# Altium PCB LED PD AB WH 3000149 (4F00228L_7P00501A).PcbDoc
Units mm, origin at the board's own origin, x right, y up, seen from the top; angles counter-clockwise.
Board outline 284.5 x 190 mm, 2 copper layers (Top Layer, Bottom Layer); 166 components, 73 nets, 404 pads, 0 vias.
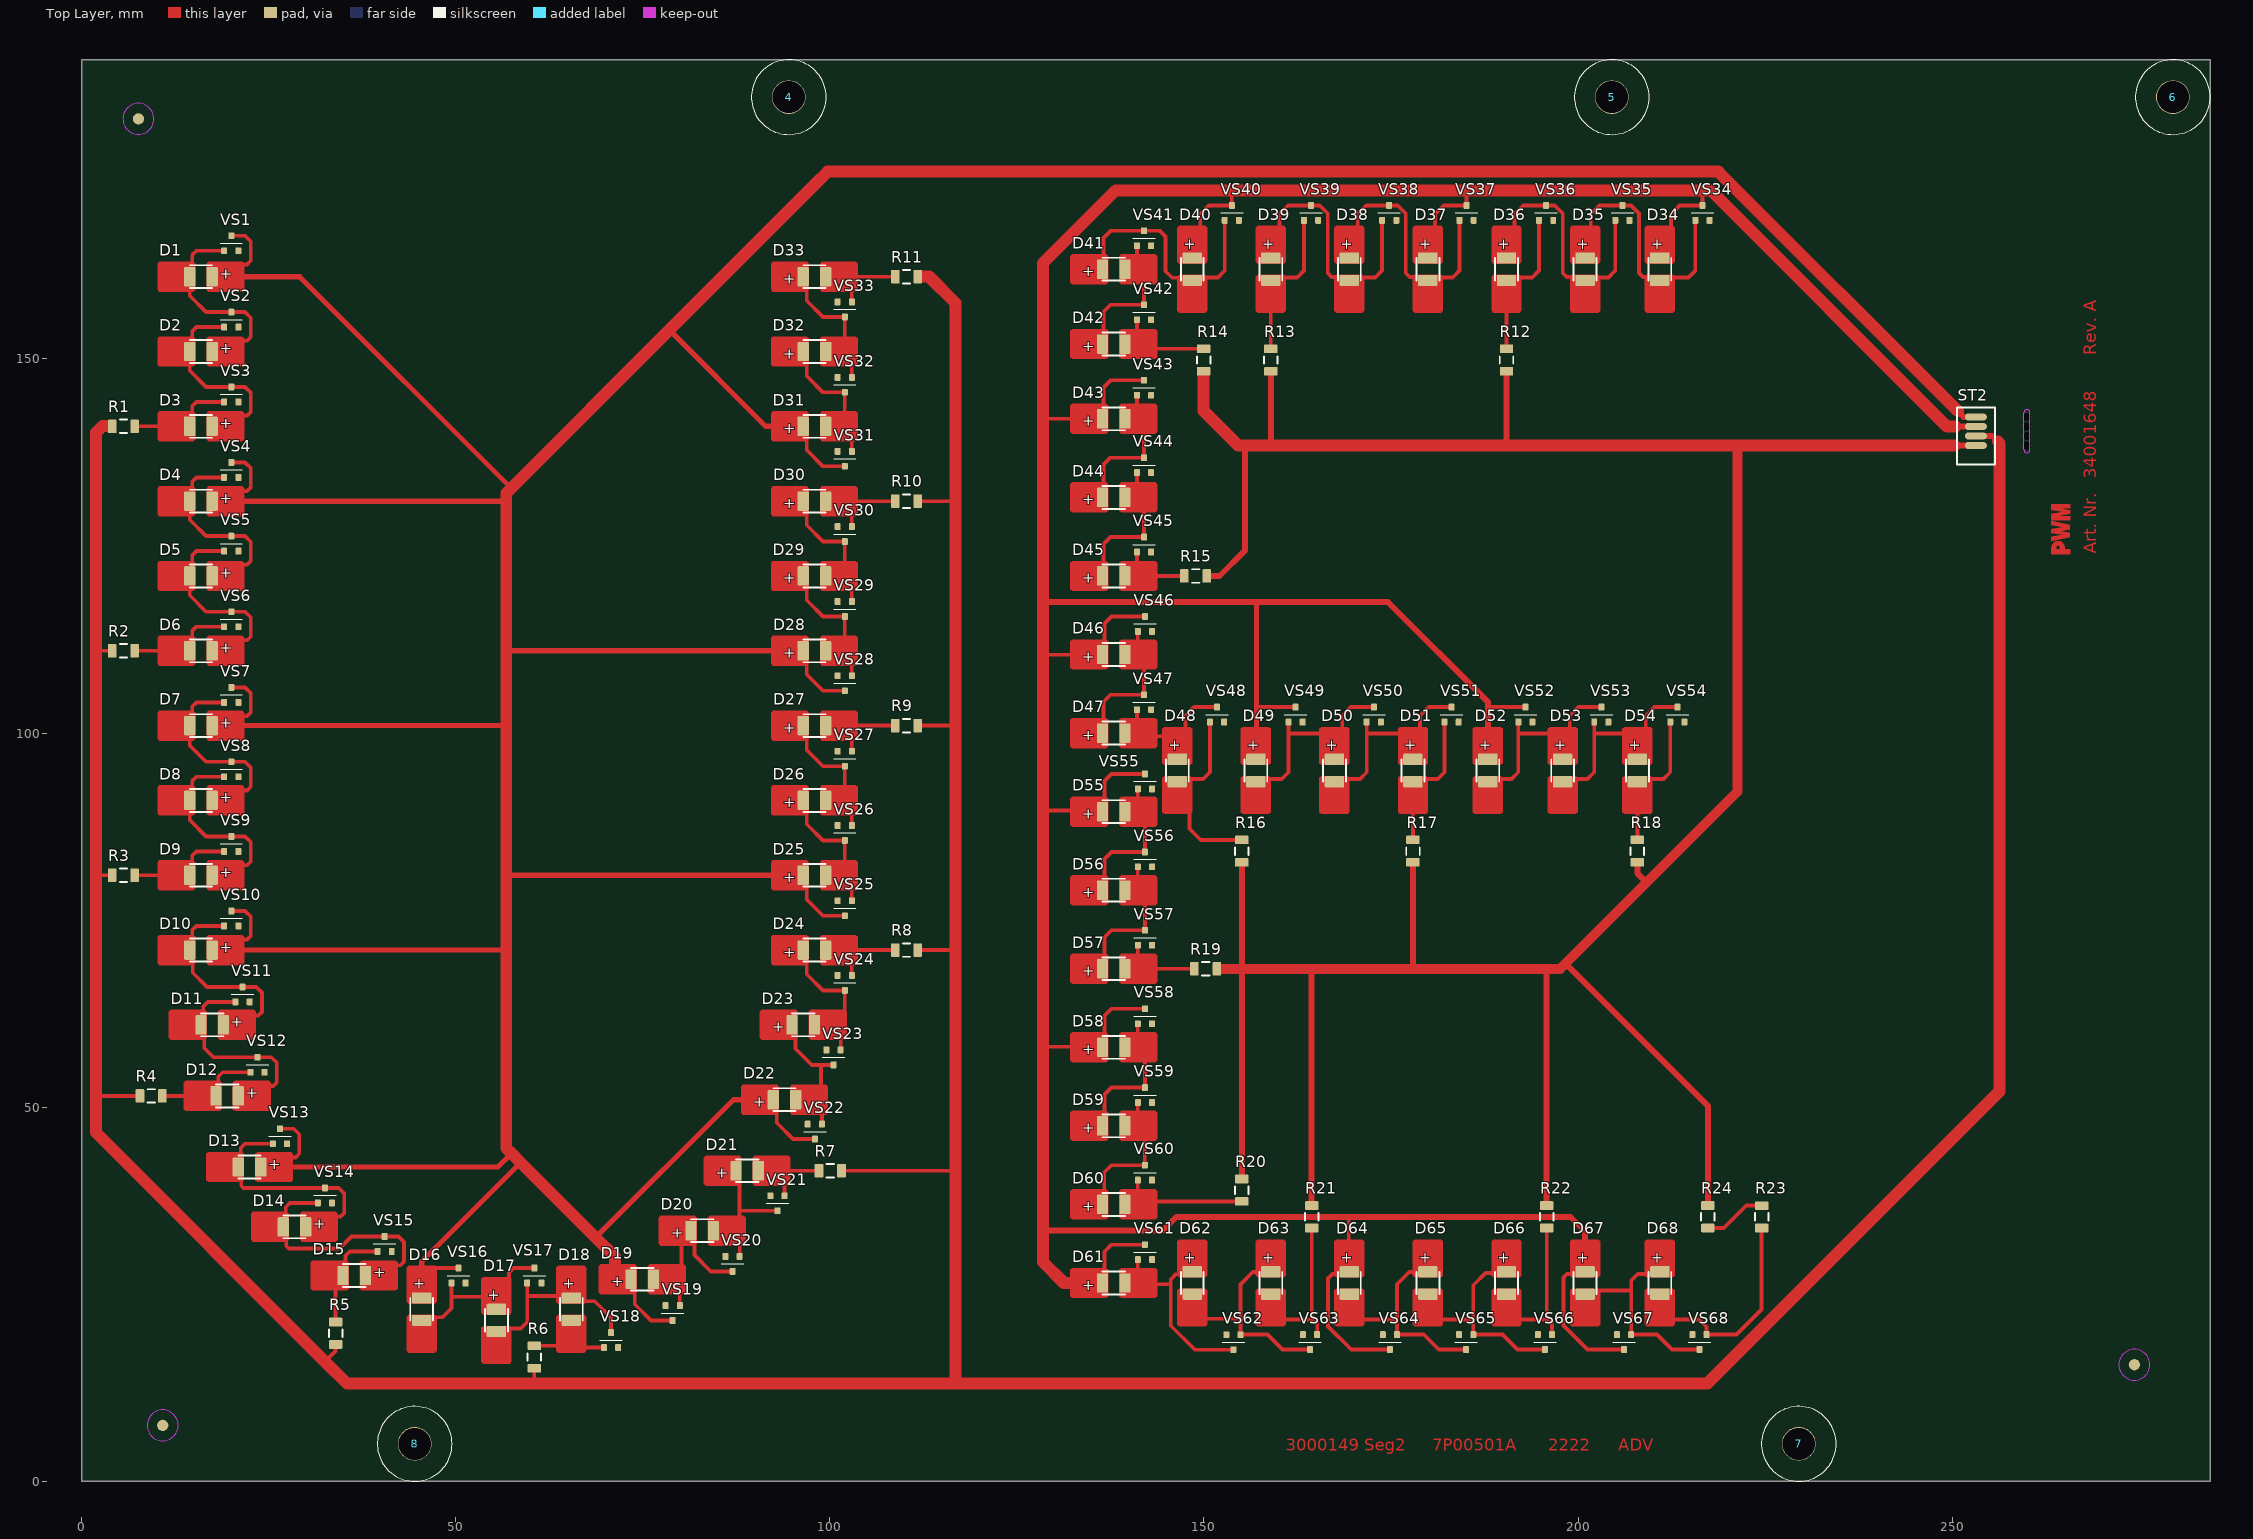
[diagram p0: Top Layer view]
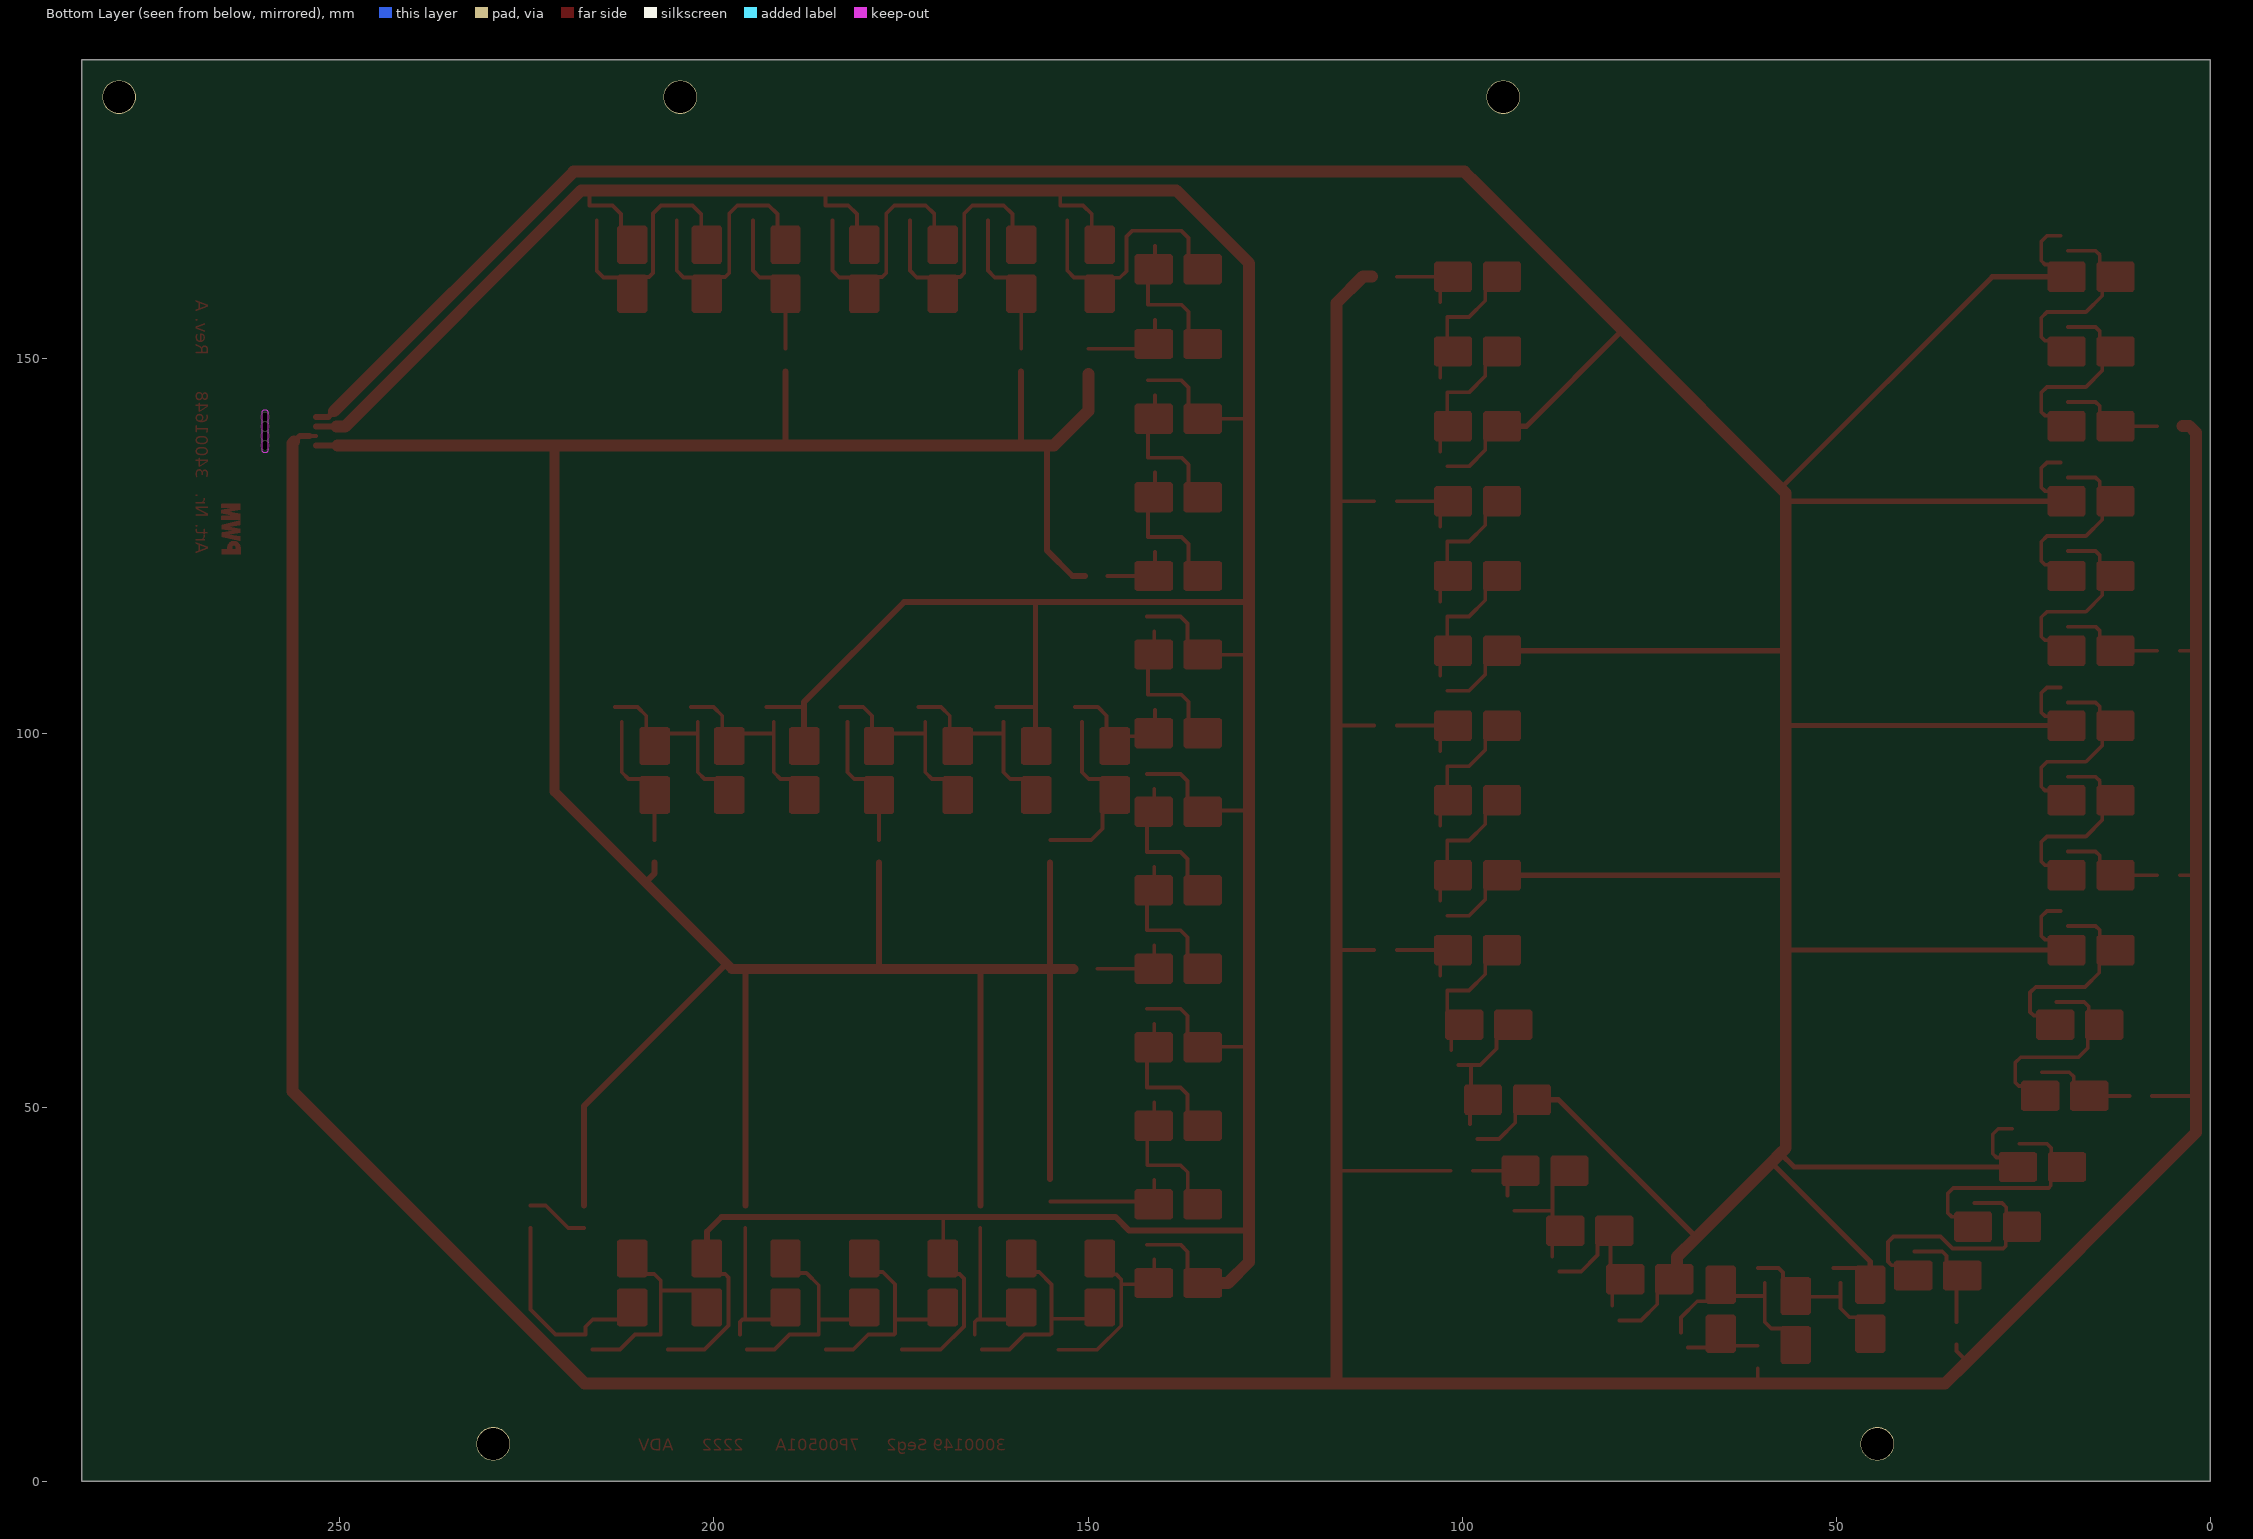
[diagram p1: Bottom Layer view, seen from below]
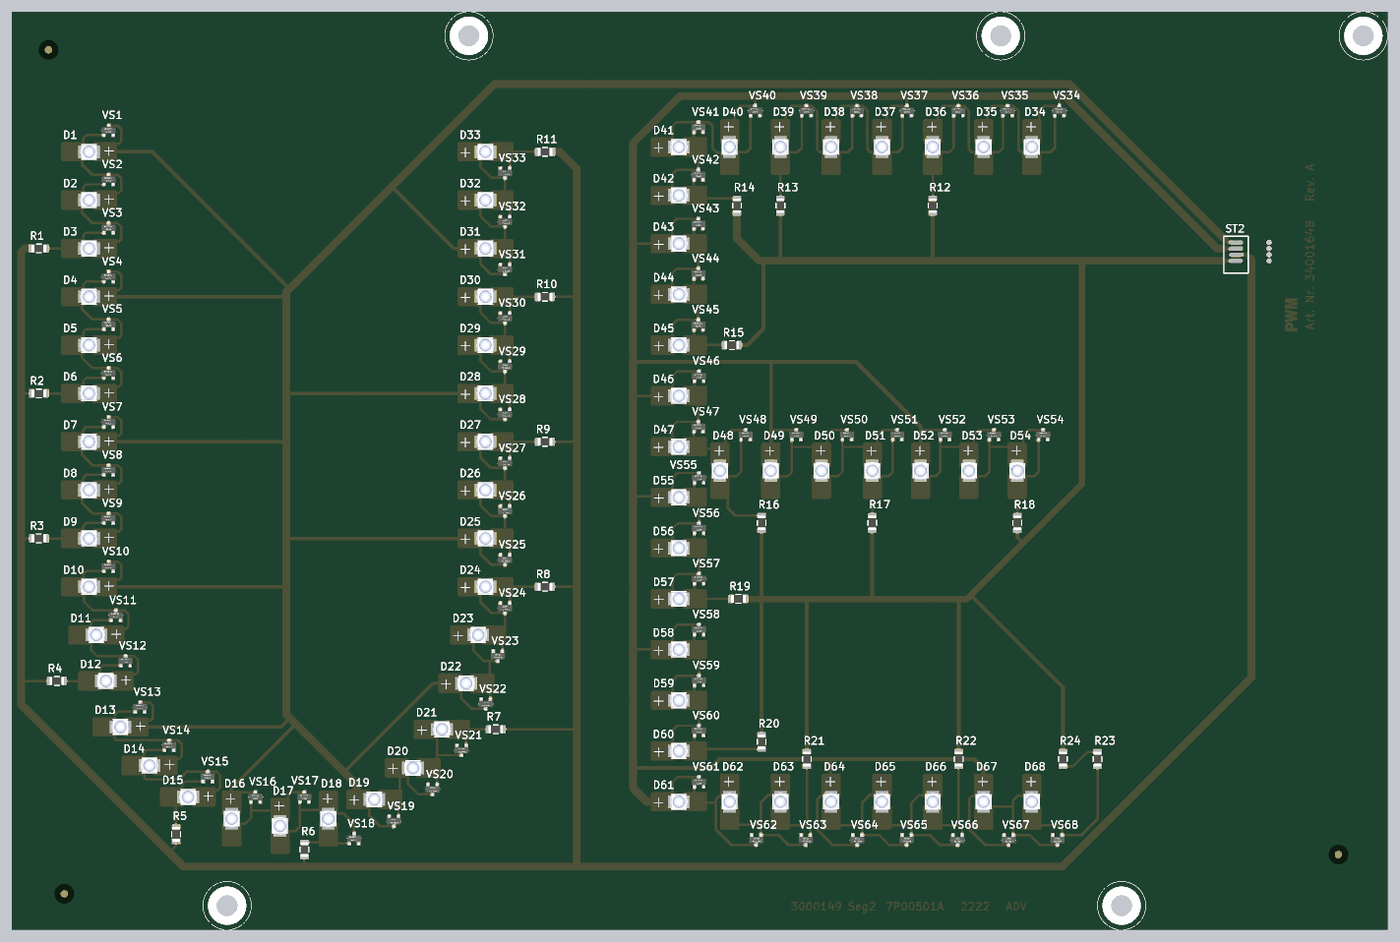
[diagram p2: 3D render of the assembled board from above, using the file's embedded part models]

## Layer stack, top to bottom
Top Solder: solder mask 0.0102, Solder Resist, Dk 3.5
Top Layer: signal copper 0.0356
Dielectric 1: dielectric 0.32, FR-4, Dk 4.8
Bottom Layer: signal copper 0.0356
Bottom Solder: solder mask 0.0102, Solder Resist, Dk 3.5

## Board outline
0,0 284.5,0 284.5,190 0,190

## Design rules (kind name [scope] priority, off if disabled: settings)
Clearance [All] p1: gap=0.3 ignorepadtopadclearanceinfootprint=FALSE
PolygonConnect [All] p1: connectstyle=Relief reliefconductorwidth=0.254 reliefentries=4 polygonreliefangle="90 Angle" airgapwidth=0.254
RoutingVias [All] p1: holewidth=0.711 width=1.27 viastyle="Through Hole" minholewidth=0.1 minwidth=0.1 maxholewidth=5 maxwidth=5
SolderMaskExpansion [All] p1: expansion=0.102
Width [All] p1: maxlimit=5 minlimit=0.1 preferedwidth=0.5
30 further rules are at their usual default settings.

## Components (designator, comment, footprint, x,y, rotation, side; value= is the part's Value field where it differs from the comment)
4 "" DRILL4.3 94.5,185 r0 top
5 "" DRILL4.3 204.5,185 r0 top
6 "" DRILL4.3 279.5,185 r0 top
7 "" DRILL4.3 229.5,5 r0 top
8 "" DRILL4.3 44.5,5 r0 top
D1 "LT_T66G" T66G 15.933,161 r0 top
D2 "LT_T66G" T66G 15.933,151 r0 top
D3 "LT_T66G" T66G 15.933,141 r0 top
D4 "LT_T66G" T66G 15.933,131 r0 top
D5 "LT_T66G" T66G 15.933,121 r0 top
D6 "LT_T66G" T66G 15.933,111 r0 top
D7 "LT_T66G" T66G 15.933,101 r0 top
D8 "LT_T66G" T66G 15.933,91 r0 top
D9 "LT_T66G" T66G 15.933,81 r0 top
D10 "LT_T66G" T66G 15.933,71 r0 top
D11 "LT_T66G" T66G 17.433,61 r0 top
D12 "LT_T66G" T66G 19.433,51.5 r0 top
D13 "LT_T66G" T66G 22.433,42 r0 top
D14 "LT_T66G" T66G 28.433,34 r0 top
D15 "LT_T66G" T66G 36.433,27.5 r0 top
D16 "LT_T66G" T66G 45.433,23 r90 top
D17 "LT_T66G" T66G 55.433,21.5 r90 top
D18 "LT_T66G" T66G 65.433,23 r90 top
D19 "LT_T66G" T66G 74.933,27 r180 top
D20 "LT_T66G" T66G 82.933,33.5 r180 top
D21 "LT_T66G" T66G 88.933,41.5 r180 top
D22 "LT_T66G" T66G 93.933,51 r180 top
D23 "LT_T66G" T66G 96.433,61 r180 top
D24 "LT_T66G" T66G 97.933,71 r180 top
D25 "LT_T66G" T66G 97.933,81 r180 top
D26 "LT_T66G" T66G 97.933,91 r180 top
D27 "LT_T66G" T66G 97.933,101 r180 top
D28 "LT_T66G" T66G 97.933,111 r180 top
D29 "LT_T66G" T66G 97.933,121 r180 top
D30 "LT_T66G" T66G 97.933,131 r180 top
D31 "LT_T66G" T66G 97.933,141 r180 top
D32 "LT_T66G" T66G 97.933,151 r180 top
D33 "LT_T66G" T66G 97.933,161 r180 top
D34 "LT_T66G" T66G 210.933,162 r90 top
D35 "LT_T66G" T66G 200.933,162 r90 top
D36 "LT_T66G" T66G 190.433,162 r90 top
D37 "LT_T66G" T66G 179.933,162 r90 top
D38 "LT_T66G" T66G 169.433,162 r90 top
D39 "LT_T66G" T66G 158.933,162 r90 top
D40 "LT_T66G" T66G 148.433,162 r90 top
D41 "LT_T66G" T66G 137.933,162 r180 top
D42 "LT_T66G" T66G 137.933,152 r180 top
D43 "LT_T66G" T66G 137.933,142 r180 top
D44 "LT_T66G" T66G 137.933,131.5 r180 top
D45 "LT_T66G" T66G 137.933,121 r180 top
D46 "LT_T66G" T66G 137.933,110.5 r180 top
D47 "LT_T66G" T66G 137.933,100 r180 top
D48 "LT_T66G" T66G 146.433,95 r90 top
D49 "LT_T66G" T66G 156.933,95 r90 top
D50 "LT_T66G" T66G 167.433,95 r90 top
D51 "LT_T66G" T66G 177.933,95 r90 top
D52 "LT_T66G" T66G 187.933,95 r90 top
D53 "LT_T66G" T66G 197.933,95 r90 top
D54 "LT_T66G" T66G 207.933,95 r90 top
D55 "LT_T66G" T66G 137.933,89.5 r180 top
D56 "LT_T66G" T66G 137.933,79 r180 top
D57 "LT_T66G" T66G 137.933,68.5 r180 top
D58 "LT_T66G" T66G 137.933,58 r180 top
D59 "LT_T66G" T66G 137.933,47.5 r180 top
D60 "LT_T66G" T66G 137.933,37 r180 top
D61 "LT_T66G" T66G 137.933,26.5 r180 top
D62 "LT_T66G" T66G 148.433,26.5 r90 top
D63 "LT_T66G" T66G 158.933,26.5 r90 top
D64 "LT_T66G" T66G 169.433,26.5 r90 top
D65 "LT_T66G" T66G 179.933,26.5 r90 top
D66 "LT_T66G" T66G 190.433,26.5 r90 top
D67 "LT_T66G" T66G 200.933,26.5 r90 top
D68 "LT_T66G" T66G 210.933,26.5 r90 top
R1 "R1206S" RC1206S 5.574,141 r0 top value=Pos.20
R2 "R1206S" RC1206S 5.574,111 r0 top value=Pos.20
R3 "R1206S" RC1206S 5.574,81 r0 top value=Pos.20
R4 "R1206S" RC1206S 9.286,51.5 r0 top value=Pos.20
R5 "R1206S" RC1206S 33.933,19.78 r90 top value=Pos.20
R6 "R1206S" RC1206S 60.494,16.6 r90 top value=Pos.20
R7 "R1206S" RC1206S 100.045,41.5 r180 top value=Pos.20
R8 "R1206S" RC1206S 110.241,71 r180 top value=Pos.20
R9 "R1206S" RC1206S 110.241,101 r180 top value=Pos.20
R10 "R1206S" RC1206S 110.241,131 r180 top value=Pos.20
R11 "R1206S" RC1206S 110.241,161 r180 top value=Pos.20
R12 "R1206S" RC1206S 190.433,149.858 r90 top value=Pos.20
R13 "R1206S" RC1206S 158.933,149.858 r90 top value=Pos.20
R14 "R1206S" RC1206S 149.957,149.858 r90 top value=Pos.20
R15 "R1206S" RC1206S 148.887,121 r180 top value=Pos.20
R16 "R1206S" RC1206S 155.05,84.223 r90 top value=Pos.20
R17 "R1206S" RC1206S 177.933,84.223 r90 top value=Pos.20
R18 "R1206S" RC1206S 207.933,84.223 r90 top value=Pos.20
R19 "R1206S" RC1206S 150.225,68.5 r180 top value=Pos.20
R20 "R1206S" RC1206S 155.05,38.9 r270 top value=Pos.20
R21 "R1206S" RC1206S 164.4,35.35 r270 top value=Pos.20
R22 "R1206S" RC1206S 195.8,35.35 r270 top value=Pos.20
R23 "R1206S" RC1206S 224.533,35.343 r270 top value=Pos.22
R24 "R1206S" RC1206S 217.353,35.35 r270 top value=Pos.20
ST2 "BAND4" BAND4 253.17,142.25 r270 top (schematic designator ST1)
VS1 "BZX84" SOT23 19.988,165.461 r90 top
VS2 "BZX84" SOT23 19.988,155.268 r90 top
VS3 "BZX84" SOT23 19.988,145.262 r90 top
VS4 "BZX84" SOT23 19.988,135.17 r90 top
VS5 "BZX84" SOT23 19.988,125.327 r90 top
VS6 "BZX84" SOT23 19.988,115.227 r90 top
VS7 "BZX84" SOT23 19.988,105.097 r90 top
VS8 "BZX84" SOT23 19.988,95.156 r90 top
VS9 "BZX84" SOT23 19.988,85.175 r90 top
VS10 "BZX84" SOT23 19.988,75.224 r90 top
VS11 "BZX84" SOT23 21.488,65.072 r90 top
VS12 "BZX84" SOT23 23.488,55.667 r90 top
VS13 "BZX84" SOT23 26.488,46.112 r90 top
VS14 "BZX84" SOT23 32.5,38.2 r90 top
VS15 "BZX84" SOT23 40.488,31.714 r90 top
VS16 "BZX84" SOT23 50.37,27.5 r90 top
VS17 "BZX84" SOT23 60.494,27.5 r90 top
VS18 "BZX84" SOT23 70.752,18.875 r90 top
VS19 "BZX84" SOT23 78.988,22.48 r270 top
VS20 "BZX84" SOT23 86.988,29.048 r270 top
VS21 "BZX84" SOT23 92.988,37.144 r270 top
VS22 "BZX84" SOT23 97.988,46.736 r270 top
VS23 "BZX84" SOT23 100.487,56.646 r270 top
VS24 "BZX84" SOT23 101.988,66.602 r270 top
VS25 "BZX84" SOT23 101.988,76.594 r270 top
VS26 "BZX84" SOT23 101.988,86.646 r270 top
VS27 "BZX84" SOT23 101.988,96.575 r270 top
VS28 "BZX84" SOT23 101.988,106.668 r270 top
VS29 "BZX84" SOT23 101.988,116.584 r270 top
VS30 "BZX84" SOT23 101.988,126.599 r270 top
VS31 "BZX84" SOT23 101.988,136.651 r270 top
VS32 "BZX84" SOT23 101.988,146.541 r270 top
VS33 "BZX84" SOT23 101.988,156.624 r270 top
VS34 "BZX84" SOT23 216.627,169.527 r90 top
VS35 "BZX84" SOT23 205.926,169.527 r90 top
VS36 "BZX84" SOT23 195.733,169.527 r90 top
VS37 "BZX84" SOT23 185.101,169.527 r90 top
VS38 "BZX84" SOT23 174.754,169.527 r90 top
VS39 "BZX84" SOT23 164.315,169.527 r90 top
VS40 "BZX84" SOT23 153.721,169.527 r90 top
VS41 "BZX84" SOT23 141.988,166.125 r90 top
VS42 "BZX84" SOT23 141.988,156.259 r90 top
VS43 "BZX84" SOT23 141.988,146.143 r90 top
VS44 "BZX84" SOT23 141.988,135.815 r90 top
VS45 "BZX84" SOT23 141.988,125.204 r90 top
VS46 "BZX84" SOT23 142.109,114.584 r90 top
VS47 "BZX84" SOT23 141.988,104.124 r90 top
VS48 "BZX84" SOT23 151.75,102.475 r90 top
VS49 "BZX84" SOT23 162.244,102.475 r90 top
VS50 "BZX84" SOT23 172.7,102.475 r90 top
VS51 "BZX84" SOT23 183.1,102.475 r90 top
VS52 "BZX84" SOT23 192.962,102.475 r90 top
VS53 "BZX84" SOT23 203.114,102.475 r90 top
VS54 "BZX84" SOT23 213.273,102.475 r90 top
VS55 "BZX84" SOT23 142.109,93.541 r90 top
VS56 "BZX84" SOT23 142.109,83.116 r90 top
VS57 "BZX84" SOT23 142.109,72.651 r90 top
VS58 "BZX84" SOT23 142.109,62.155 r90 top
VS59 "BZX84" SOT23 142.109,51.618 r90 top
VS60 "BZX84" SOT23 142.1,41.25 r90 top
VS61 "BZX84" SOT23 142.109,30.625 r90 top
VS62 "BZX84" SOT23 153.933,18.593 r270 top
VS63 "BZX84" SOT23 164.175,18.6 r270 top
VS64 "BZX84" SOT23 174.85,18.6 r270 top
VS65 "BZX84" SOT23 185.05,18.6 r270 top
VS66 "BZX84" SOT23 195.575,18.6 r270 top
VS67 "BZX84" SOT23 206.15,18.6 r270 top
VS68 "BZX84" SOT23 216.229,18.6 r270 top

## Footprints (in the part's own frame and the unit in brackets; to place one, negate y for a bottom-side part, rotate by r counter-clockwise, add the part's x,y. Pads: shape width x height; smd on the part's side, far side on the other; paste and mask are expansions set on the pad)
BAND4 [mm]
  oval 0.91x2.95 smd paste-0.025: 1(0,0) 2(1.27,0) 3(2.54,0) 4(3.81,0)
  round 1.2 hole 1.2 unplated: 5(0,6.83) 6(1.27,6.83) 7(2.54,6.83) 8(3.81,6.83)
  Keep-Out Layer lines w0.1: 4.395,6.43 ccw(c4.395,6.83) 4.395,7.23 -0.585,7.23 ccw(c-0.585,6.83) -0.585,6.43 4.395,6.43
  silkscreen extent -1.27,-2.54 6.35,2.54
DRILL4.3 [mm]
  round 4.5 hole 4.3 unplated: 1(0,0)
  silkscreen extent -5,-5 5,5, body extent -4,-4 4,4
RC1206S [mm]
  rrect20% 1.15x1.8 smd paste-0.025 mask+0.1: 1(-1.5,0) 2(1.5,0)
  silkscreen extent -0.5,-0.9 0.5,0.9, body extent -1.5,-0.8 1.5,0.8, height 0.63
SOT23 [mm]
  rrect25% 0.9x0.8 smd paste-0.025: 1(-1,0.95) 2(-1,-0.95) 3(1,0)
  silkscreen extent 0,-1.5 0,1.5, body extent -1.25,-1.5 1.25,1.5, height 1.09
T66G [mm]
  rrect20% 1.5x2.6 smd paste-0.025 mask-1: 1(-1.5,0) 2(1.5,0)
  Top Layer region: -5.55,2 -5.8,1.75 -5.8,-1.75 -5.55,-2 -1,-2 -0.75,-1.75 -0.75,1.75 -1,2
  Top Layer region: 0.75,1.75 0.75,-1.75 1,-2 5.55,-2 5.8,-1.75 5.8,1.75 5.55,2 1,2
  silkscreen extent -1.5,-1.53 1.5,1.53, body extent -1.78,-1.4 1.77,1.4, height 3.82

## Part data
D1 D2 D3 D4 D5 D6 D7 D8 D9 D10 D11 D12 D13 D14 D15 D16 D17 D18 D19 D20 D21 D22 D23 D24 D25 D26 D27 D28 D29 D30 D31 D32 D33 D34 D35 D36 D37 D38 D39 D40 D41 D42 D43 D44 D45 D46 D47 D48 D49 D50 D51 D52 D53 D54 D55 D56 D57 D58 D59 D60 D61 D62 D63 D64 D65 D66 D67 D68: "{Description}"
VS1 VS2 VS3 VS4 VS5 VS6 VS7 VS8 VS9 VS10 VS11 VS12 VS13 VS14 VS15 VS16 VS17 VS18 VS19 VS20 VS21 VS22 VS23 VS24 VS25 VS26 VS27 VS28 VS29 VS30 VS31 VS32 VS33 VS34 VS35 VS36 VS37 VS38 VS39 VS40 VS41 VS42 VS43 VS44 VS45 VS46 VS47 VS48 VS49 VS50 VS51 VS52 VS53 VS54 VS55 VS56 VS57 VS58 VS59 VS60 VS61 VS62 VS63 VS64 VS65 VS66 VS67 VS68: OriginalName=DIODE

## Free pads (board coordinates)
  round 1.5 smd paste-1 mask+1.3: 2(7.575,182.1) 2(10.825,7.475) 2(274.35,15.575)

## Nets (pads, with @x,y where several pads share a name; then routed paths per layer and width w, separated by ;. In a path a pad name is that pad's centre, name@x,y a point inside that pad or via, vN(x,y) a via of type N, cw(c..) or ccw(c..) an arc to the next point about the centre after c; other vN are vias at no path point)
+U1: D1.2 D4.2 D7.2 D10.2 D13.2 D16.2 D19.2 D22.2 D25.2 D28.2 D31.2 ST2.1 VS1.3 VS4.3 VS7.3 VS10.3 VS13.3 VS16.3 VS19.3 VS22.3 VS25.3 VS28.3 VS31.3 | length 785.3
  Top Layer w0.5: VS10.3 21.839,76.224 22.582,75.482 22.582,72.886 22.087,72.392 21.315,72.392 ; VS7.3 21.839,106.097 22.582,105.355 22.582,102.759 22.087,102.265 21.315,102.265 ; VS4.3 21.839,136.17 22.582,135.428 22.582,132.832 22.087,132.338 21.315,132.338 ; VS1.3 21.839,166.461 22.582,165.718 22.582,163.123 22.087,162.628 21.315,162.628 ; VS13.3 28.339,47.112 29.082,46.369 29.082,43.773 28.588,43.279 27.815,43.279 ; 46.665,28.5 VS16.3 ; D19.2@73.433,26.857 73.905,26.385 73.905,23.654 76.078,21.48 VS19.3 ; D22.2@92.433,51.113 92.905,50.641 92.905,47.91 95.078,45.736 VS22.3 ; D25.2@96.433,80.97 96.905,80.498 96.905,77.767 99.078,75.594 VS25.3 ; D28.2@96.433,111.045 96.905,110.573 96.905,107.842 99.078,105.668 VS28.3 ; D31.2@96.433,141.027 96.905,140.555 96.905,137.824 99.078,135.651 VS31.3
  Top Layer w0.7: D10.2 56.468,71 56.74,71.272 ; D7.2 56.486,101 56.74,101.255 ; D4.2 56.601,131 56.74,130.86 ; D1.2 29.127,161 57.401,132.726 ; D13.2 55.613,42 57.438,43.824 ; D16.2 45.433,29.347 58.674,42.588 ; 56.74,80.818 56.923,81 D25.2 ; 56.74,110.744 56.996,111 D28.2 ; 68.691,32.571 87.121,51 D22.2 ; 78.549,153.875 91.424,141 D31.2
  Top Layer w0.8: 250.776,143.016 251.543,142.25 ST2.1
  Top Layer w1.6: 71.285,27.969 71.285,29.977 68.691,32.571 58.674,42.588 57.438,43.824 56.74,44.522 56.74,71.272 56.74,80.818 56.74,101.255 56.74,110.744 56.74,130.86 56.74,132.066 57.401,132.726 78.549,153.875 98.001,173.326 99.707,175.032 218.761,175.032 250.776,143.016
+U2: D34.2 D37.2 D40.2 D43.2 D46.2 D49.2 D52.2 D55.2 D58.2 D61.2 D64.2 D67.2 ST2.2 VS34.3 VS37.3 VS40.3 VS43.3 VS46.3 VS49.3 VS52.3 VS55.3 VS58.3 VS61.3 VS64.3 VS67.3 | length 588
  Top Layer w0.5: 128.456,58.1 128.492,58.064 133.192,58.064 ; 128.456,89.81 128.599,89.668 133.05,89.668 ; 128.456,110.748 128.741,110.463 133.192,110.463 ; 128.456,141.908 128.552,142.004 132.913,142.004 ; 136.571,143.662 136.571,146.207 137.507,147.143 VS43.3 ; 136.692,28.145 136.692,30.689 137.628,31.625 VS61.3 ; 136.692,59.675 136.692,62.219 137.628,63.155 VS58.3 ; 136.692,91.061 136.692,93.605 137.628,94.541 VS55.3 ; 136.692,112.103 136.692,114.648 137.628,115.584 VS46.3 ; 149.711,167.089 149.505,167.295 149.505,169.375 150.656,170.527 VS40.3 153.721,172.494 153.685,172.53 ; 157.02,103.486 157.031,103.475 VS49.3 ; 158.028,100.244 158.234,100.038 ; 168.075,27.69 167.186,27.69 166.58,27.084 166.58,20.691 169.67,17.6 VS64.3 ; 169.337,31.29 169.337,35.263 169.39,35.316 ; 181.091,167.089 180.885,167.295 180.885,169.375 182.036,170.527 VS37.3 185.101,172.392 184.963,172.53 ; 188.012,103.475 VS52.3 ; 188.746,100.244 188.952,100.038 ; 199.375,27.69 198.486,27.69 198.042,27.246 198.042,20.8 201.242,17.6 VS67.3 ; 212.617,167.089 212.411,167.295 212.411,169.375 213.562,170.527 VS34.3 216.627,172.483 216.674,172.53
  Top Layer w0.7: 156.939,117.509 157.02,117.428 157.02,103.486 157.02,100.245
  Top Layer w0.8: 128.456,33.496 144.494,33.496 146.314,35.316 169.39,35.316 198.99,35.316 200.931,33.375 200.931,31.598 ; 128.456,117.226 128.738,117.509 156.939,117.509 174.595,117.509 187.933,104.171 D52.2 ; 250.423,140.972 ST2.2
  Top Layer w1.6: D61.2 131.289,26.5 128.456,29.333 128.456,33.496 128.456,58.1 128.456,89.81 128.456,110.748 128.456,117.226 128.456,141.908 128.456,162.78 138.207,172.53 153.685,172.53 184.963,172.53 216.674,172.53 217.734,172.53 249.285,140.98 250.423,140.972
-U1: R1.1 R2.1 R3.1 R4.1 R5.1 R6.1 R7.1 R8.1 R9.1 R10.1 R11.1 ST2.3 | length 666.8
  Top Layer w0.5: 1.917,51.394 2.023,51.5 R4.1 ; 1.917,81.042 1.958,81 R3.1 ; 1.917,110.995 1.922,111 R2.1 ; 32.516,15.997 33.933,17.414 R5.1 ; R6.1 60.494,13.183 60.591,13.086 ; R7.1 116.744,41.5 116.815,41.429 ; R8.1 116.761,71 116.815,70.946 ; R9.1 116.725,101 116.815,101.09 ; R10.1 116.761,131 116.815,131.054 ; ST2.3 ST2.3@254.049,139.71
  Top Layer w0.8: ST2.3@254.049,139.71 255.358,139.71 256.101,138.966
  Top Layer w1.6: R1.1@3.7,141.067 2.811,141.067 1.917,140.172 1.917,110.995 1.917,81.042 1.917,51.394 1.917,46.596 32.516,15.997 35.427,13.086 60.591,13.086 116.815,13.086 ; R11.1@112.021,161.032 113.248,161.032 116.815,157.466 116.815,131.054 116.815,101.09 116.815,70.946 116.815,41.429 116.815,13.086 ; 256.101,138.966 256.33,138.737 256.33,52.118 217.299,13.086 116.815,13.086
-U2: R12.1 R13.1 R14.1 R15.1 R16.1 R17.1 R18.1 R19.1 R20.1 R21.1 R22.1 R24.1 ST2.4 | length 439.3
  Top Layer w0.8: R15.1 152.073,121 155.45,124.377 155.45,138.44 ; R20.1 155.05,68.473 R16.1 ; R13.1 158.933,138.509 159.002,138.44 ; R21.1 164.4,68.411 164.461,68.473 ; 177.787,68.473 177.933,68.618 R17.1 ; R12.1 190.433,138.536 190.529,138.44 ; R22.1 195.8,68.402 195.871,68.473 ; 198.336,69.192 217.353,50.175 R24.1 ; R18.1 207.933,81.24 209.158,80.015 ; 250.318,138.44 ST2.4
  Top Layer w1.3: R19.1@151.949,68.473 155.05,68.473 164.461,68.473 177.787,68.473 195.871,68.473 197.616,68.473 198.336,69.192 209.158,80.015 221.312,92.168 221.312,138.44
  Top Layer w1.6: R14.1@149.957,147.997 149.957,143.046 154.563,138.44 155.45,138.44 159.002,138.44 190.529,138.44 221.312,138.44 250.318,138.44
NetD1_1: D1.1 D2.2 VS1.1 VS2.3 | length 21.8
  Top Layer w0.5: D1.1 14.433,158.463 16.628,156.268 VS2.3 21.839,156.268 22.582,155.525 22.582,152.929 22.087,152.435 21.315,152.435 ; 14.758,162.556 14.758,163.882 15.336,164.461 VS1.1
NetD2_1: D2.1 D3.2 VS2.1 VS3.3 | length 21.8
  Top Layer w0.5: D2.1@14.433,150.995 14.433,148.458 16.628,146.262 VS3.3 21.839,146.262 22.582,145.52 22.582,142.924 22.087,142.43 21.315,142.43 ; 14.758,152.362 14.758,153.689 15.336,154.268 VS2.1
NetD3_1: D3.1 R1.2 VS3.1 | length 10.8
  Top Layer w0.5: R1.2 11.879,141 12.006,141.127 ; 14.758,142.357 14.758,143.684 15.336,144.262 VS3.1
NetD4_1: D4.1 D5.2 VS4.1 VS5.3 | length 21.8
  Top Layer w0.5: D4.1@14.433,131.06 14.433,128.523 16.628,126.327 VS5.3 21.839,126.327 22.582,125.585 22.582,122.989 22.087,122.495 21.315,122.495 ; D4.1@14.758,132.265 14.758,133.592 15.336,134.17 VS4.1
NetD5_1: D5.1 D6.2 VS5.1 VS6.3 | length 21.8
  Top Layer w0.5: D5.1@14.433,120.96 14.433,118.423 16.628,116.227 VS6.3 21.839,116.227 22.582,115.485 22.582,112.889 22.087,112.395 21.315,112.395 ; 14.758,122.422 14.758,123.749 15.336,124.327 VS5.1
NetD6_1: D6.1 R2.2 VS6.1 | length 10.1
  Top Layer w0.5: R2.2 11.192,111 11.258,110.934 ; 14.758,112.322 14.758,113.649 15.336,114.227 VS6.1
NetD7_1: D7.1 D8.2 VS7.1 VS8.3 | length 21.8
  Top Layer w0.5: D7.1@14.433,100.888 14.433,98.351 16.628,96.156 VS8.3 21.839,96.156 22.582,95.413 22.582,92.817 22.087,92.323 21.315,92.323 ; D7.1@14.758,102.192 14.758,103.519 15.336,104.097 VS7.1
NetD8_1: D8.1 D9.2 VS8.1 VS9.3 | length 21.8
  Top Layer w0.5: D8.1@14.433,90.908 14.433,88.371 16.628,86.175 VS9.3 21.839,86.175 22.582,85.432 22.582,82.837 22.087,82.342 21.315,82.342 ; D8.1@14.758,92.25 14.758,93.577 15.336,94.156 VS8.1
NetD9_1: D9.1 R3.2 VS9.1 | length 11.6
  Top Layer w0.5: R3.2 12.772,81 12.837,80.935 ; D9.1@14.758,82.27 14.758,83.596 15.336,84.175 VS9.1
NetD10_1: D10.1 D11.2 VS10.1 VS11.3 | length 23.4
  Top Layer w0.5: D10.1 14.837,70.595 14.837,67.977 16.742,66.072 VS11.3 23.339,66.072 24.082,65.329 24.082,62.734 23.588,62.239 22.815,62.239 ; 14.758,72.319 14.758,73.646 15.336,74.224 VS10.1
NetD11_1: D11.1 D12.2 VS11.1 VS12.3 | length 23.7
  Top Layer w0.5: D11.1 16.386,60.547 16.386,57.898 17.616,56.667 VS12.3 25.339,56.667 26.082,55.925 26.082,53.329 25.588,52.835 24.815,52.835 ; D11.1@16.258,62.167 16.258,63.493 16.836,64.072 VS11.1
NetD12_1: D12.1 R4.2 VS12.1 | length 10.8
  Top Layer w0.5: R4.2 15.68,51.5 15.69,51.49 ; D12.1@18.258,52.762 18.258,54.089 18.836,54.667 VS12.1
NetD13_1: D13.1 D14.2 VS13.1 VS14.3 | length 26.8
  Top Layer w0.5: D13.1 21.318,41.615 21.318,39.503 21.621,39.2 VS14.3 34.352,39.2 35.094,38.457 35.094,35.862 34.6,35.368 33.827,35.368 ; D13.1@21.258,43.206 21.258,44.533 21.836,45.112 VS13.1
NetD14_1: D14.1 D15.2 VS14.1 VS15.3 | length 28
  Top Layer w0.5: D14.1@27.27,35.295 27.27,36.621 27.849,37.2 VS14.1 ; 27.346,32.665 27.346,31.45 27.68,31.116 34.471,31.116 36.069,32.714 VS15.3 42.339,32.714 43.082,31.972 43.082,29.376 42.588,28.882 41.815,28.882
NetD15_1: D15.1 R5.2 VS15.1 | length 11.5
  Top Layer w0.5: R5.2 33.933,26.733 34.074,26.874 ; 35.258,28.809 35.258,30.136 35.836,30.714 VS15.1
NetD16_1: D16.1 D17.2 VS16.1 VS17.3 | length 17.2
  Top Layer w0.5: D16.1 45.849,21.916 48.22,21.916 49.42,23.116 49.42,24.746 ; VS16.1 49.42,24.746 ; 53.787,24.654 49.512,24.654 49.42,24.746 ; 57.119,26.799 57.119,27.905 57.714,28.5 VS17.3
NetD17_1: D17.1 D18.2 VS17.1 VS18.3 | length 22.7
  Top Layer w0.5: 56.897,20.257 57.063,20.423 58.667,20.423 59.544,21.3 59.544,24.775 ; VS17.1 59.544,24.775 ; VS18.3 70.752,21.883 68.563,24.072 65.861,24.072 D18.2 65.158,24.775 59.544,24.775
NetD18_1: D18.1 R6.2 VS18.1 | length 9
  Top Layer w0.5: R6.2 65.087,18.1 ; 65.448,17.954 65.527,17.875 VS18.1
NetD19_1: D19.1 D20.2 VS19.1 VS20.3 | length 17
  Top Layer w0.5: VS19.1 79.938,26.722 ; 80.151,28.646 80.151,32.985 ; D20.2@81.433,33.425 81.905,32.953 81.905,30.222 84.078,28.048 VS20.3
NetD20_1: D20.1 D21.2 VS20.1 VS21.3 | length 14.5
  Top Layer w0.5: D21.2@87.433,41.521 87.905,41.049 87.905,34.692 87.906,34.691 ; 87.856,32.523 87.938,32.442 VS20.1 ; 87.994,36.144 VS21.3
NetD21_1: D21.1 R7.2 VS21.1 | length 8.9
  Top Layer w0.5: 92.71,41.449 92.762,41.5 R7.2 ; 93.877,41.193 93.938,41.132 VS21.1
NetD22_1: D22.1 D23.2 VS22.1 VS23.3 | length 14.7
  Top Layer w0.5: D23.2@94.933,61.023 95.405,60.551 95.405,57.82 97.578,55.646 98.84,55.646 ; 98.807,49.981 98.938,49.85 VS22.1 ; 98.808,52.618 98.808,55.614 98.84,55.646 ; VS23.3 98.84,55.646
NetD23_1: D23.1 D24.2 VS23.1 VS24.3 | length 15.2
  Top Layer w0.5: D24.2@96.433,70.979 96.905,70.507 96.905,67.776 99.078,65.602 VS24.3 101.988,62.687 101.624,62.323 ; 101.422,60.07 101.438,60.055 VS23.1
NetD24_1: D24.1 R8.2 VS24.1 | length 9.7
  Top Layer w0.5: 102.17,71 R8.2 ; VS24.1 102.938,70.742
NetD25_1: D25.1 D26.2 VS25.1 VS26.3 | length 16.2
  Top Layer w0.5: D26.2@96.433,91.023 96.905,90.551 96.905,87.82 99.078,85.646 VS26.3 101.988,82.164 102.099,82.053 ; 102.52,80.596 102.938,80.178 VS25.1
NetD26_1: D26.1 D27.2 VS26.1 VS27.3 | length 16.2
  Top Layer w0.5: D27.2@96.433,100.952 96.905,100.48 96.905,97.749 99.078,95.575 VS27.3 101.988,91.72 101.84,91.572 ; 102.876,90.342 102.938,90.28 VS26.1
NetD27_1: D27.1 R9.2 VS27.1 | length 10.1
  Top Layer w0.5: 102.072,101 102.876,101 ; VS27.1 102.938,100.938 102.876,101 ; R9.2 102.876,101
NetD28_1: D28.1 D29.2 VS28.1 VS29.3 | length 15.8
  Top Layer w0.5: D29.2@96.433,120.96 96.905,120.488 96.905,117.757 99.078,115.584 VS29.3 101.988,112.092 101.936,112.04 ; VS28.1 102.938,110.555
NetD29_1: D29.1 D30.2 VS29.1 VS30.3 | length 16.5
  Top Layer w0.5: D30.2@96.433,130.975 96.905,130.503 96.905,127.772 99.078,125.599 VS30.3 101.988,121.684 101.736,121.433 ; 102.802,120.389 102.938,120.254 VS29.1
NetD30_1: D30.1 R10.2 VS30.1 | length 9.7
  Top Layer w0.5: 102.18,131.025 102.205,131 R10.2 ; VS30.1 102.938,130.317 103.202,130.581
NetD31_1: D31.1 D32.2 VS31.1 VS32.3 | length 16.5
  Top Layer w0.5: D32.2@96.433,150.917 96.905,150.445 96.905,147.714 99.078,145.541 VS32.3 101.988,142.045 101.759,141.816 ; VS31.1 102.938,140.842 103.046,140.95
NetD32_1: D32.1 D33.2 VS32.1 VS33.3 | length 15.8
  Top Layer w0.5: D33.2 96.905,160.528 96.905,157.797 99.078,155.624 VS33.3 101.988,152.138 ; 102.847,150.431 102.938,150.34 VS32.1
NetD33_1: D33.1 R11.2 VS33.1 | length 10.7
  Top Layer w0.5: 101.53,161 102.778,161 ; VS33.1 102.938,160.84 102.778,161 ; R11.2 102.778,161
NetD34_1: D34.1 D35.2 VS34.1 VS35.3 | length 29.4
  Top Layer w0.5: 201.71,167.295 201.71,169.375 202.861,170.527 VS35.3 207.076,170.527 208.142,169.46 208.142,161.493 208.673,160.962 209.431,160.962 ; 212.325,160.901 214.766,160.901 215.677,161.812 VS34.1
NetD35_1: D35.1 D36.2 VS35.1 VS36.3 | length 29.6
  Top Layer w0.5: 191.723,167.089 191.516,167.295 191.516,169.375 192.667,170.527 VS36.3 196.883,170.527 197.949,169.46 197.949,161.493 198.479,160.962 199.237,160.962 ; D35.1@201.624,160.901 204.065,160.901 204.976,161.812 VS35.1
NetD36_1: D36.1 R12.2 VS36.1 | length 17.3
  Top Layer w0.5: R12.2 190.433,158.028 190.529,158.125 ; D36.1@191.43,160.901 193.871,160.901 194.782,161.812 VS36.1
NetD37_1: D37.1 D38.2 VS37.1 VS38.3 | length 29.6
  Top Layer w0.5: 170.744,167.089 170.538,167.295 170.538,169.375 171.689,170.527 VS38.3 175.904,170.527 176.97,169.46 176.97,161.493 177.501,160.962 178.259,160.962 ; D37.1@180.799,160.901 183.24,160.901 184.151,161.812 VS37.1
NetD38_1: D38.1 D39.2 VS38.1 VS39.3 | length 29.6
  Top Layer w0.5: 160.306,167.089 160.099,167.295 160.099,169.375 161.25,170.527 VS39.3 165.466,170.527 166.532,169.46 166.532,161.493 167.062,160.962 167.82,160.962 ; D38.1@170.452,160.901 172.893,160.901 173.804,161.812 VS38.1
NetD39_1: D39.1 R13.2 VS39.1 | length 16.7
  Top Layer w0.5: R13.2 158.933,157.656 ; D39.1@160.013,160.901 162.454,160.901 163.365,161.812 VS39.1
NetD40_1: D40.1 D41.2 VS40.1 VS41.3 | length 28.9
  Top Layer w0.5: 136.571,163.645 136.571,166.189 137.507,167.125 VS41.3 144.107,167.125 144.869,166.363 144.869,161.734 145.755,160.848 146.768,160.848 ; D40.1@149.419,160.901 151.86,160.901 152.771,161.812 VS40.1
NetD41_1: D41.1 D42.2 VS41.1 VS42.3 | length 15.2
  Top Layer w0.5: 136.571,153.778 136.571,156.322 137.507,157.259 VS42.3 141.988,161.899 142.14,162.052 ; 140.967,163.124 141.038,163.195 VS41.1
NetD42_1: D42.1 R14.2 VS42.1 | length 10.4
  Top Layer w0.5: 140.941,153.301 141.038,153.397 VS42.1 ; 141.532,151.358 R14.2
NetD43_1: D43.1 D44.2 VS43.1 VS44.3 | length 14.9
  Top Layer w0.5: 136.571,133.335 136.571,135.879 137.507,136.815 VS44.3 141.988,141.146 ; 141.038,142.965 VS43.1
NetD44_1: D44.1 D45.2 VS44.1 VS45.3 | length 14.8
  Top Layer w0.5: 136.571,122.724 136.571,125.268 137.507,126.204 VS45.3 141.988,130.206 ; 141.007,132.379 141.038,132.41 VS44.1
NetD45_1: D45.1 R15.2 VS45.1 | length 7.7
  Top Layer w0.5: 140.834,122.189 141.038,122.392 VS45.1 ; 141.792,121 R15.2
NetD46_1: D46.1 D47.2 VS46.1 VS47.3 | length 14.7
  Top Layer w0.5: 136.571,101.643 136.571,104.187 137.507,105.124 VS47.3 141.988,109.48 141.891,109.576 ; 140.988,111.826 141.159,111.996 VS46.1
NetD47_1: D47.1 D48.2 VS47.1 VS48.3 | length 11.9
  Top Layer w0.5: 141.038,100.393 VS47.1 ; 143.16,99.578 145.295,99.578 ; 147.74,100.038 147.534,100.244 147.534,102.324 148.685,103.475 VS48.3
NetD48_1: D48.1 R16.2 VS48.1 | length 20.8
  Top Layer w0.5: D48.1@147.448,93.849 149.889,93.849 150.8,94.76 VS48.1 ; 148.066,89.955 148.066,87.214 149.557,85.723 R16.2
NetD49_1: D49.1 D50.2 VS49.1 VS50.3 | length 22.6
  Top Layer w0.5: D49.1@157.942,93.849 160.383,93.849 161.294,94.76 VS49.1 ; 161.294,99.932 166.367,99.932 ; 168.69,100.038 168.484,100.244 168.484,102.324 169.635,103.475 VS50.3
NetD50_1: D50.1 D51.2 VS50.1 VS51.3 | length 22.6
  Top Layer w0.5: D50.1@168.398,93.849 170.839,93.849 171.75,94.76 VS50.1 ; 171.75,99.932 176.824,99.932 ; 179.09,100.038 178.884,100.244 178.884,102.324 180.035,103.475 VS51.3
NetD51_1: D51.1 R17.2 VS51.1 | length 16.7
  Top Layer w0.5: 177.863,91.986 177.933,91.917 R17.2 ; D51.1@178.798,93.849 181.239,93.849 182.15,94.76 VS51.1
NetD52_1: D52.1 D53.2 VS52.1 VS53.3 | length 22.6
  Top Layer w0.5: D52.1@188.66,93.849 191.101,93.849 192.012,94.76 VS52.1 ; 192.012,99.932 197.086,99.932 ; 199.104,100.038 198.897,100.244 198.897,102.324 200.049,103.475 VS53.3
NetD53_1: D53.1 D54.2 VS53.1 VS54.3 | length 22.7
  Top Layer w0.5: D53.1@198.812,93.849 201.253,93.849 202.164,94.76 202.164,99.932 ; VS53.1 202.164,99.932 ; 207.29,99.985 207.237,99.932 202.164,99.932 ; 209.263,100.038 209.057,100.244 209.057,102.324 210.208,103.475 VS54.3
NetD54_1: D54.1 R18.2 VS54.1 | length 18.2
  Top Layer w0.5: R18.2 D54.1 ; D54.1@208.971,93.849 211.412,93.849 212.323,94.76 VS54.1
NetD55_1: D55.1 D56.2 VS55.1 VS56.3 | length 15.1
  Top Layer w0.5: 136.692,80.636 136.692,83.18 137.628,84.116 VS56.3 142.109,88.959 ; VS55.1 141.159,90.678 141.219,90.618
NetD56_1: D56.1 D57.2 VS56.1 VS57.3 | length 14.6
  Top Layer w0.5: 136.692,70.17 136.692,72.715 137.628,73.651 VS57.3 142.109,78.154 ; 141.159,80.368 VS56.1
NetD57_1: D57.1 R19.2 VS57.1 | length 8
  Top Layer w0.5: 141.159,69.467 VS57.1 ; 142.88,68.5 R19.2
NetD58_1: D58.1 D59.2 VS58.1 VS59.3 | length 15.2
  Top Layer w0.5: 136.692,49.137 136.692,51.682 137.628,52.618 VS59.3 142.109,57.485 142.026,57.568 ; 140.988,59.375 141.159,59.546 VS58.1
NetD59_1: D59.1 D60.2 VS59.1 VS60.3 | length 15.9
  Top Layer w0.5: 136.683,38.769 136.683,41.314 137.62,42.25 VS60.3 142.1,47.124 ; 141.159,47.913 VS59.1
NetD60_1: D60.1 R20.2 VS60.1 | length 16.4
  Top Layer w0.5: 141.15,37.624 VS60.1 ; 141.324,37.543 141.459,37.407 R20.2@155.05,37.407
NetD61_1: D61.1 D62.2 VS61.1 VS62.3 | length 21.7
  Top Layer w0.5: VS61.1 141.159,28.192 141.449,27.901 ; 143.454,26.332 145.554,26.332 145.571,26.35 ; D62.2@147.158,27.683 146.269,27.683 145.571,26.985 145.571,26.35 ; VS62.3 148.753,17.593 145.571,20.774 145.571,26.35
NetD62_1: D62.1 D63.2 VS62.1 VS63.3 | length 25.8
  Top Layer w0.5: 149.305,21.723 154.793,21.723 ; VS62.1@154.883,19.713 154.883,26.316 156.528,27.961 D63.2@157.954,27.961 ; VS62.1@155.046,19.6 158.498,19.6 160.498,17.6 VS63.3
NetD63_1: D63.1 R21.2 VS63.1 | length 19.5
  Top Layer w0.5: 159.728,21.632 164.448,21.632 ; R21.2 164.4,21.68 164.448,21.632 ; VS63.1 165.125,21.312 164.805,21.632 164.448,21.632
NetD64_1: D64.1 D65.2 VS64.1 VS65.3 | length 25.8
  Top Layer w0.5: 170.403,21.632 175.742,21.632 ; D65.2@178.871,27.968 177.445,27.968 175.8,26.323 175.8,20.66 175.8,19.721 175.921,19.6 179.372,19.6 181.372,17.6 VS65.3
NetD65_1: D65.1 D66.2 VS65.1 VS66.3 | length 26.1
  Top Layer w0.5: 180.603,21.632 185.968,21.632 ; 189.071,27.848 187.645,27.848 186,26.202 VS65.1 189.898,19.6 191.898,17.6 VS66.3
NetD66_1: D66.1 R22.2 VS66.1 | length 19.5
  Top Layer w0.5: 191.128,21.632 195.968,21.632 ; R22.2 195.8,21.8 195.968,21.632 ; VS66.1 196.525,21.279 196.172,21.632 195.968,21.632
NetD67_1: D67.1 D68.2 VS67.1 VS68.3 | length 24.5
  Top Layer w0.5: 202.468,25.486 207.082,25.486 207.1,25.505 ; 209.437,27.706 207.97,27.706 207.1,26.836 207.1,25.505 ; VS68.3 212.552,17.6 210.552,19.6 VS67.1 207.1,25.505
NetD68_1: D68.1 R23.2 VS68.1 | length 26.5
  Top Layer w0.5: 211.782,21.632 216.207,21.632 217.179,20.66 VS68.1 221.172,19.6 224.533,22.961 R23.2 ; 212.707,24.909 212.735,24.881
NetR23_1: R23.1 R24.2 | length 8.4
  Top Layer w0.5: R24.2 219.473,33.85 222.466,36.843 R23.1
pads on no net: 4.1 5.1 6.1 7.1 8.1 ST2.5 ST2.6 ST2.7 ST2.8 VS1.2 VS2.2 VS3.2 VS4.2 VS5.2 VS6.2 VS7.2 VS8.2 VS9.2 VS10.2 VS11.2 VS12.2 VS13.2 VS14.2 VS15.2 VS16.2 VS17.2 VS18.2 VS19.2 VS20.2 VS21.2 VS22.2 VS23.2 VS24.2 VS25.2 VS26.2 VS27.2 VS28.2 VS29.2 VS30.2 VS31.2 VS32.2 VS33.2 VS34.2 VS35.2 VS36.2 VS37.2 VS38.2 VS39.2 VS40.2 VS41.2 VS42.2 VS43.2 VS44.2 VS45.2 VS46.2 VS47.2 VS48.2 VS49.2 VS50.2 VS51.2 VS52.2 VS53.2 VS54.2 VS55.2 VS56.2 VS57.2 VS58.2 VS59.2 VS60.2 VS61.2 VS62.2 VS63.2 VS64.2 VS65.2 VS66.2 VS67.2 VS68.2
copper on no net: | length 136.9
  Top Layer w0.05: 264.405,129.008 ccw(c264.38,129.008) 264.405,129.008
  Top Layer w0.1: 263.357,125.715 263.357,126.249 ; 263.357,126.784 263.357,127.276 ; 263.357,127.812 263.357,128.343 ; 263.371,128.529 263.371,129.286 ; 263.371,129.86 263.371,130.616 ; 263.431,125.731 263.431,126.261 ; 263.431,126.773 263.431,127.287 ; 263.431,127.8 263.431,128.326 ; 263.446,128.529 263.446,129.299 ; 263.446,129.847 263.446,130.616 ; 263.506,125.748 263.506,126.273 ; 263.506,126.761 263.506,127.298 ; 263.506,127.788 263.506,128.309 ; 263.521,128.529 263.521,129.313 ; 263.521,129.833 263.521,130.616 ; 263.581,125.764 263.581,126.285 ; 263.581,126.749 263.581,127.31 ; 263.581,127.776 263.581,128.293 ; 263.595,128.529 263.595,129.327 ; 263.595,129.82 263.595,130.616 ; 263.655,125.781 263.655,126.296 ; 263.655,126.737 263.655,127.321 ; 263.655,127.764 263.655,128.276 ; 263.67,128.529 263.67,129.34 ; 263.67,129.807 263.67,130.616 ; 263.73,125.797 263.73,126.308 ; 263.73,126.725 263.73,127.333 ; 263.73,127.752 263.73,128.259 ; 263.745,128.529 263.745,129.354 ; 263.745,129.793 263.745,130.616 ; 263.805,125.813 263.805,126.32 ; 263.805,126.713 263.805,127.344 ; 263.805,127.74 263.805,128.243 ; 263.819,128.529 263.819,129.367 ; 263.819,129.78 263.819,130.616 ; 263.879,125.83 263.879,126.332 ; 263.879,126.701 263.879,127.356 ; 263.879,127.728 263.879,128.226 ; 263.894,128.529 263.894,129.381 ; 263.894,129.767 263.894,130.616 ; 263.954,125.846 263.954,126.343 ; 263.954,126.69 263.954,127.367 ; 263.954,127.716 263.954,128.209 ; 263.969,128.529 263.969,129.395 ; 263.969,129.754 263.969,130.616 ; 264.029,125.863 264.029,126.355 ; 264.029,126.678 264.029,127.378 ; 264.029,127.704 264.029,128.193 ; 264.043,128.529 264.043,129.408 ; 264.043,129.74 264.043,130.616 ; 264.103,125.879 264.103,126.367 ; 264.103,126.666 264.103,127.39 ; 264.103,127.692 264.103,128.176 ; 264.118,128.529 264.118,129.422 ; 264.118,129.727 264.118,130.616 ; 264.178,125.896 264.178,126.379 ; 264.178,126.654 264.178,127.401 ; 264.178,127.68 264.178,128.159 ; 264.193,128.529 264.193,129.435 ; 264.193,129.714 264.193,130.616 ; 264.253,125.912 264.253,126.391 ; 264.253,126.642 264.253,127.413 ; 264.253,127.668 264.253,128.143 ; 264.267,128.529 264.267,129.449 ; 264.267,129.7 264.267,130.616 ; 264.327,125.928 264.327,126.402 ; 264.327,126.63 264.327,127.424 ; 264.327,127.656 264.327,128.126 ; 264.342,128.529 264.342,129.029 ; 264.342,129.09 264.342,129.463 ; 264.342,129.687 264.342,130.058 ; 264.342,130.115 264.342,130.616 ; 264.402,125.945 264.402,126.414 ; 264.402,126.619 264.402,126.98 ; 264.402,127.072 264.402,127.435 ; 264.402,127.644 264.402,128.109 ; 264.417,128.529 264.417,129.009 ; 264.417,129.117 264.417,129.476 ; 264.417,129.674 264.417,130.028 ; 264.417,130.137 264.417,130.616 ; 264.477,125.961 264.477,126.426 ; 264.477,126.607 264.477,126.968 ; 264.477,127.086 264.477,127.447 ; 264.477,127.632 264.477,128.093 ; 264.491,128.529 264.491,129.009 ; 264.491,129.132 264.491,129.49 ; 264.491,129.661 264.491,130.013 ; 264.491,130.137 264.491,130.616 ; 264.551,125.978 264.551,126.438 ; 264.551,126.595 264.551,126.957 ; 264.551,127.097 264.551,127.458 ; 264.551,127.62 264.551,128.076 ; 264.566,128.529 264.566,129.009 ; 264.566,129.148 264.566,129.503 ; 264.566,129.647 264.566,129.998 ; 264.566,130.137 264.566,130.616 ; 264.626,125.994 264.626,126.449 ; 264.626,126.583 264.626,126.946 ; 264.626,127.108 264.626,127.47 ; 264.626,127.608 264.626,128.059 ; 264.641,128.529 264.641,129.01 ; 264.641,129.163 264.641,129.517 ; 264.641,129.634 264.641,129.983 ; 264.641,130.137 264.641,130.616 ; 264.701,126.01 264.701,126.461 ; 264.701,126.571 264.701,126.936 ; 264.701,127.119 264.701,127.481 ; 264.701,127.596 264.701,128.043 ; 264.715,128.529 264.715,129.01 ; 264.715,129.178 264.715,129.539 ; 264.715,129.61 264.715,129.968 ; 264.715,130.137 264.715,130.616 ; 264.775,126.027 264.775,126.504 ; 264.775,126.525 264.775,126.925 ; 264.775,127.129 264.775,127.501 ; 264.775,127.574 264.775,128.026 ; 264.79,128.529 264.79,129.01 ; 264.79,129.194 264.79,129.953 ; 264.79,130.137 264.79,130.616 ; 264.85,126.043 264.85,126.914 ; 264.85,127.14 264.85,128.009 ; 264.865,128.529 264.865,129.011 ; 264.865,129.209 264.865,129.938 ; 264.865,130.137 264.865,130.616 ; 264.925,126.06 264.925,126.903 ; 264.925,127.151 264.925,127.993 ; 264.939,128.529 264.939,129.011 ; 264.939,129.225 264.939,129.923 ; 264.939,130.137 264.939,130.616 ; 264.999,126.076 264.999,126.892 ; 264.999,127.162 264.999,127.976 ; 265.014,128.529 265.014,129.011 ; 265.014,129.24 265.014,129.908 ; 265.014,130.137 265.014,130.616 ; 265.074,126.093 265.074,126.882 ; 265.074,127.173 265.074,127.959 ; 265.089,128.529 265.089,129.012 ; 265.089,129.255 265.089,129.893 ; 265.089,130.137 265.089,130.616 ; 265.149,126.109 265.149,126.871 ; 265.149,127.183 265.149,127.943 ; 265.163,128.529 265.163,129.012 ; 265.163,129.271 265.163,129.878 ; 265.163,130.137 265.163,130.616 ; 265.224,126.125 265.224,126.86 ; 265.224,127.194 265.224,127.926 ; 265.238,128.529 265.238,129.012 ; 265.238,129.286 265.238,129.863 ; 265.238,130.137 265.238,130.616 ; 265.298,126.142 265.298,126.849 ; 265.298,127.205 265.298,127.909 ; 265.313,128.529 265.313,129.013 ; 265.313,129.301 265.313,129.848 ; 265.313,130.137 265.313,130.616 ; 265.373,126.158 265.373,126.838 ; 265.373,127.216 265.373,127.893 ; 265.387,128.529 265.387,129.013 ; 265.387,129.317 265.387,129.833 ; 265.387,130.137 265.387,130.616 ; 265.448,126.175 265.448,126.828 ; 265.448,127.227 265.448,127.876 ; 265.462,128.529 265.462,129.013 ; 265.462,129.332 265.462,129.818 ; 265.462,130.137 265.462,130.616 ; 265.522,126.191 265.522,126.817 ; 265.522,127.237 265.522,127.859 ; 265.537,128.529 265.537,129.014 ; 265.537,129.347 265.537,129.803 ; 265.537,130.137 265.537,130.616 ; 265.597,126.207 265.597,126.806 ; 265.597,127.248 265.597,127.843 ; 265.611,128.529 265.611,129.014 ; 265.611,129.363 265.611,129.788 ; 265.611,130.137 265.611,130.616 ; 265.672,126.224 265.672,126.795 ; 265.672,127.259 265.672,127.826 ; 265.686,128.529 265.686,129.014 ; 265.686,129.378 265.686,129.773 ; 265.686,130.137 265.686,130.616 ; 263.317,125.706 263.317,126.243 264.736,126.467 264.764,126.481 264.778,126.509 264.778,126.516 264.768,126.546 264.743,126.564 264.736,126.566 263.324,126.79 263.324,127.271 264.751,127.489 264.779,127.503 264.793,127.531 264.793,127.538 264.783,127.568 264.758,127.586 264.751,127.588 263.325,127.818 263.331,128.348 265.746,127.809 265.746,127.27 264.411,127.077 264.383,127.063 264.368,127.034 264.368,127.027 264.378,126.997 264.404,126.979 264.411,126.978 265.746,126.785 265.739,126.239 263.317,125.706 ; 263.332,128.529 263.332,129.279 264.692,129.526 264.719,129.541 264.733,129.57 264.726,129.601 264.702,129.622 264.692,129.625 263.332,129.867 263.332,130.616 265.761,130.616 265.754,130.137 264.38,130.137 264.35,130.127 264.332,130.101 264.333,130.069 264.353,130.045 264.37,130.037 265.754,129.759 265.754,129.392 264.37,129.107 264.343,129.092 264.33,129.063 264.338,129.032 264.362,129.012 264.38,129.008 265.754,129.014 265.754,128.529 263.332,128.529
  Top Layer w0.65: 263.604,124.823 cw(c264.161,124.825) 264.716,124.874

## Keep-outs
Top Layer:
  circle w0.013: c7.575,182.1 r2.066
  circle w0.013: c274.35,15.575 r2.066
  circle w0.013: c10.825,7.475 r2.066

## Other copper
Top Layer:
  region: 263.273,123.97 263.273,124.845 263.929,124.845 263.929,123.97
  region: 264.409,124.17 264.409,124.901 265.037,124.901 265.037,124.17
  region: 263.273,123.879 263.273,124.543 265.787,124.543 265.787,123.879
  text "Rev. A" at 269.248,150.502 h1.67 r90
  text "34001648" at 269.248,134.002 h1.67 r90
  text "Art. Nr." at 269.248,124.002 h1.67 r90
  text "7P00501A" at 180.528,4.086 h1.59
  text "2222" at 196.028,4.086 h1.59
  text "ADV" at 205.388,4.086 h1.59
  text "3000149 Seg2" at 160.915,4.074 h1.59

## Silkscreen, mask and mechanical layers (free items; w line width, h text height)
Board:
  lines w0.01: 0,0 284.5,0 284.5,190 0,190 0,0
  lines w0.1: 259.6,137.854 ccw(c260,137.855) 260.4,137.855 260.4,142.835 ; 259.6,137.855 259.6,142.835 cw(c260,142.835) 260.4,142.836
Leds:
  drawing of 531 lines, arcs and shapes, not listed
UL:
  lines w0.1: 245.937,2.478 245.937,13.978 259.937,13.978 259.937,2.478 245.937,2.478
  text "UL Area" at 247.937,6.978 h1.59

## Text inside footprints (layer, text, board x,y; h text height)
D1: Top Overlay "+" at 18.433,160.2 h2.5; Mechanical 13 "+" at 18.333,160 h1.25
D2: Top Overlay "+" at 18.433,150.2 h2.5; Mechanical 13 "+" at 18.333,150 h1.25
D3: Top Overlay "+" at 18.433,140.2 h2.5; Mechanical 13 "+" at 18.333,140 h1.25
D4: Top Overlay "+" at 18.433,130.2 h2.5; Mechanical 13 "+" at 18.333,130 h1.25
D5: Top Overlay "+" at 18.433,120.2 h2.5; Mechanical 13 "+" at 18.333,120 h1.25
D6: Top Overlay "+" at 18.433,110.2 h2.5; Mechanical 13 "+" at 18.333,110 h1.25
D7: Top Overlay "+" at 18.433,100.2 h2.5; Mechanical 13 "+" at 18.333,100 h1.25
D8: Top Overlay "+" at 18.433,90.2 h2.5; Mechanical 13 "+" at 18.333,90 h1.25
D9: Top Overlay "+" at 18.433,80.2 h2.5; Mechanical 13 "+" at 18.333,80 h1.25
D10: Top Overlay "+" at 18.433,70.2 h2.5; Mechanical 13 "+" at 18.333,70 h1.25
D11: Top Overlay "+" at 19.933,60.2 h2.5; Mechanical 13 "+" at 19.833,60 h1.25
D12: Top Overlay "+" at 21.933,50.7 h2.5; Mechanical 13 "+" at 21.833,50.5 h1.25
D13: Top Overlay "+" at 24.933,41.2 h2.5; Mechanical 13 "+" at 24.833,41 h1.25
D14: Top Overlay "+" at 30.933,33.2 h2.5; Mechanical 13 "+" at 30.833,33 h1.25
D15: Top Overlay "+" at 38.933,26.7 h2.5; Mechanical 13 "+" at 38.833,26.5 h1.25
D16: Top Overlay "+" at 46.233,25.5 h2.5 r90; Mechanical 13 "+" at 46.433,25.4 h1.25 r90
D17: Top Overlay "+" at 56.233,24 h2.5 r90; Mechanical 13 "+" at 56.433,23.9 h1.25 r90
D18: Top Overlay "+" at 66.233,25.5 h2.5 r90; Mechanical 13 "+" at 66.433,25.4 h1.25 r90
D19: Top Overlay "+" at 72.433,27.8 h2.5 r180; Mechanical 13 "+" at 72.533,28 h1.25 r180
D20: Top Overlay "+" at 80.433,34.3 h2.5 r180; Mechanical 13 "+" at 80.533,34.5 h1.25 r180
D21: Top Overlay "+" at 86.433,42.3 h2.5 r180; Mechanical 13 "+" at 86.533,42.5 h1.25 r180
D22: Top Overlay "+" at 91.433,51.8 h2.5 r180; Mechanical 13 "+" at 91.533,52 h1.25 r180
D23: Top Overlay "+" at 93.933,61.8 h2.5 r180; Mechanical 13 "+" at 94.033,62 h1.25 r180
D24: Top Overlay "+" at 95.433,71.8 h2.5 r180; Mechanical 13 "+" at 95.533,72 h1.25 r180
D25: Top Overlay "+" at 95.433,81.8 h2.5 r180; Mechanical 13 "+" at 95.533,82 h1.25 r180
D26: Top Overlay "+" at 95.433,91.8 h2.5 r180; Mechanical 13 "+" at 95.533,92 h1.25 r180
D27: Top Overlay "+" at 95.433,101.8 h2.5 r180; Mechanical 13 "+" at 95.533,102 h1.25 r180
D28: Top Overlay "+" at 95.433,111.8 h2.5 r180; Mechanical 13 "+" at 95.533,112 h1.25 r180
D29: Top Overlay "+" at 95.433,121.8 h2.5 r180; Mechanical 13 "+" at 95.533,122 h1.25 r180
D30: Top Overlay "+" at 95.433,131.8 h2.5 r180; Mechanical 13 "+" at 95.533,132 h1.25 r180
D31: Top Overlay "+" at 95.433,141.8 h2.5 r180; Mechanical 13 "+" at 95.533,142 h1.25 r180
D32: Top Overlay "+" at 95.433,151.8 h2.5 r180; Mechanical 13 "+" at 95.533,152 h1.25 r180
D33: Top Overlay "+" at 95.433,161.8 h2.5 r180; Mechanical 13 "+" at 95.533,162 h1.25 r180
D34: Top Overlay "+" at 211.733,164.5 h2.5 r90; Mechanical 13 "+" at 211.933,164.4 h1.25 r90
D35: Top Overlay "+" at 201.733,164.5 h2.5 r90; Mechanical 13 "+" at 201.933,164.4 h1.25 r90
D36: Top Overlay "+" at 191.233,164.5 h2.5 r90; Mechanical 13 "+" at 191.433,164.4 h1.25 r90
D37: Top Overlay "+" at 180.733,164.5 h2.5 r90; Mechanical 13 "+" at 180.933,164.4 h1.25 r90
D38: Top Overlay "+" at 170.233,164.5 h2.5 r90; Mechanical 13 "+" at 170.433,164.4 h1.25 r90
D39: Top Overlay "+" at 159.733,164.5 h2.5 r90; Mechanical 13 "+" at 159.933,164.4 h1.25 r90
D40: Top Overlay "+" at 149.233,164.5 h2.5 r90; Mechanical 13 "+" at 149.433,164.4 h1.25 r90
D41: Top Overlay "+" at 135.433,162.8 h2.5 r180; Mechanical 13 "+" at 135.533,163 h1.25 r180
D42: Top Overlay "+" at 135.433,152.8 h2.5 r180; Mechanical 13 "+" at 135.533,153 h1.25 r180
D43: Top Overlay "+" at 135.433,142.8 h2.5 r180; Mechanical 13 "+" at 135.533,143 h1.25 r180
D44: Top Overlay "+" at 135.433,132.3 h2.5 r180; Mechanical 13 "+" at 135.533,132.5 h1.25 r180
D45: Top Overlay "+" at 135.433,121.8 h2.5 r180; Mechanical 13 "+" at 135.533,122 h1.25 r180
D46: Top Overlay "+" at 135.433,111.3 h2.5 r180; Mechanical 13 "+" at 135.533,111.5 h1.25 r180
D47: Top Overlay "+" at 135.433,100.8 h2.5 r180; Mechanical 13 "+" at 135.533,101 h1.25 r180
D48: Top Overlay "+" at 147.233,97.5 h2.5 r90; Mechanical 13 "+" at 147.433,97.4 h1.25 r90
D49: Top Overlay "+" at 157.733,97.5 h2.5 r90; Mechanical 13 "+" at 157.933,97.4 h1.25 r90
D50: Top Overlay "+" at 168.233,97.5 h2.5 r90; Mechanical 13 "+" at 168.433,97.4 h1.25 r90
D51: Top Overlay "+" at 178.733,97.5 h2.5 r90; Mechanical 13 "+" at 178.933,97.4 h1.25 r90
D52: Top Overlay "+" at 188.733,97.5 h2.5 r90; Mechanical 13 "+" at 188.933,97.4 h1.25 r90
D53: Top Overlay "+" at 198.733,97.5 h2.5 r90; Mechanical 13 "+" at 198.933,97.4 h1.25 r90
D54: Top Overlay "+" at 208.733,97.5 h2.5 r90; Mechanical 13 "+" at 208.933,97.4 h1.25 r90
D55: Top Overlay "+" at 135.433,90.3 h2.5 r180; Mechanical 13 "+" at 135.533,90.5 h1.25 r180
D56: Top Overlay "+" at 135.433,79.8 h2.5 r180; Mechanical 13 "+" at 135.533,80 h1.25 r180
D57: Top Overlay "+" at 135.433,69.3 h2.5 r180; Mechanical 13 "+" at 135.533,69.5 h1.25 r180
D58: Top Overlay "+" at 135.433,58.8 h2.5 r180; Mechanical 13 "+" at 135.533,59 h1.25 r180
D59: Top Overlay "+" at 135.433,48.3 h2.5 r180; Mechanical 13 "+" at 135.533,48.5 h1.25 r180
D60: Top Overlay "+" at 135.433,37.8 h2.5 r180; Mechanical 13 "+" at 135.533,38 h1.25 r180
D61: Top Overlay "+" at 135.433,27.3 h2.5 r180; Mechanical 13 "+" at 135.533,27.5 h1.25 r180
D62: Top Overlay "+" at 149.233,29 h2.5 r90; Mechanical 13 "+" at 149.433,28.9 h1.25 r90
D63: Top Overlay "+" at 159.733,29 h2.5 r90; Mechanical 13 "+" at 159.933,28.9 h1.25 r90
D64: Top Overlay "+" at 170.233,29 h2.5 r90; Mechanical 13 "+" at 170.433,28.9 h1.25 r90
D65: Top Overlay "+" at 180.733,29 h2.5 r90; Mechanical 13 "+" at 180.933,28.9 h1.25 r90
D66: Top Overlay "+" at 191.233,29 h2.5 r90; Mechanical 13 "+" at 191.433,28.9 h1.25 r90
D67: Top Overlay "+" at 201.733,29 h2.5 r90; Mechanical 13 "+" at 201.933,28.9 h1.25 r90
D68: Top Overlay "+" at 211.733,29 h2.5 r90; Mechanical 13 "+" at 211.933,28.9 h1.25 r90